# Altium PCB Flow_Pump显示板_V2.0.PcbDoc
Units mm, origin at the board's own origin, x right, y up, seen from the top; angles counter-clockwise.
Board outline 95.01 x 95.01 mm, 2 copper layers (Top Layer, Bottom Layer); 39 components, 34 nets, 112 pads, 133 vias.
Unrouted connection lines stored in the file: 141.
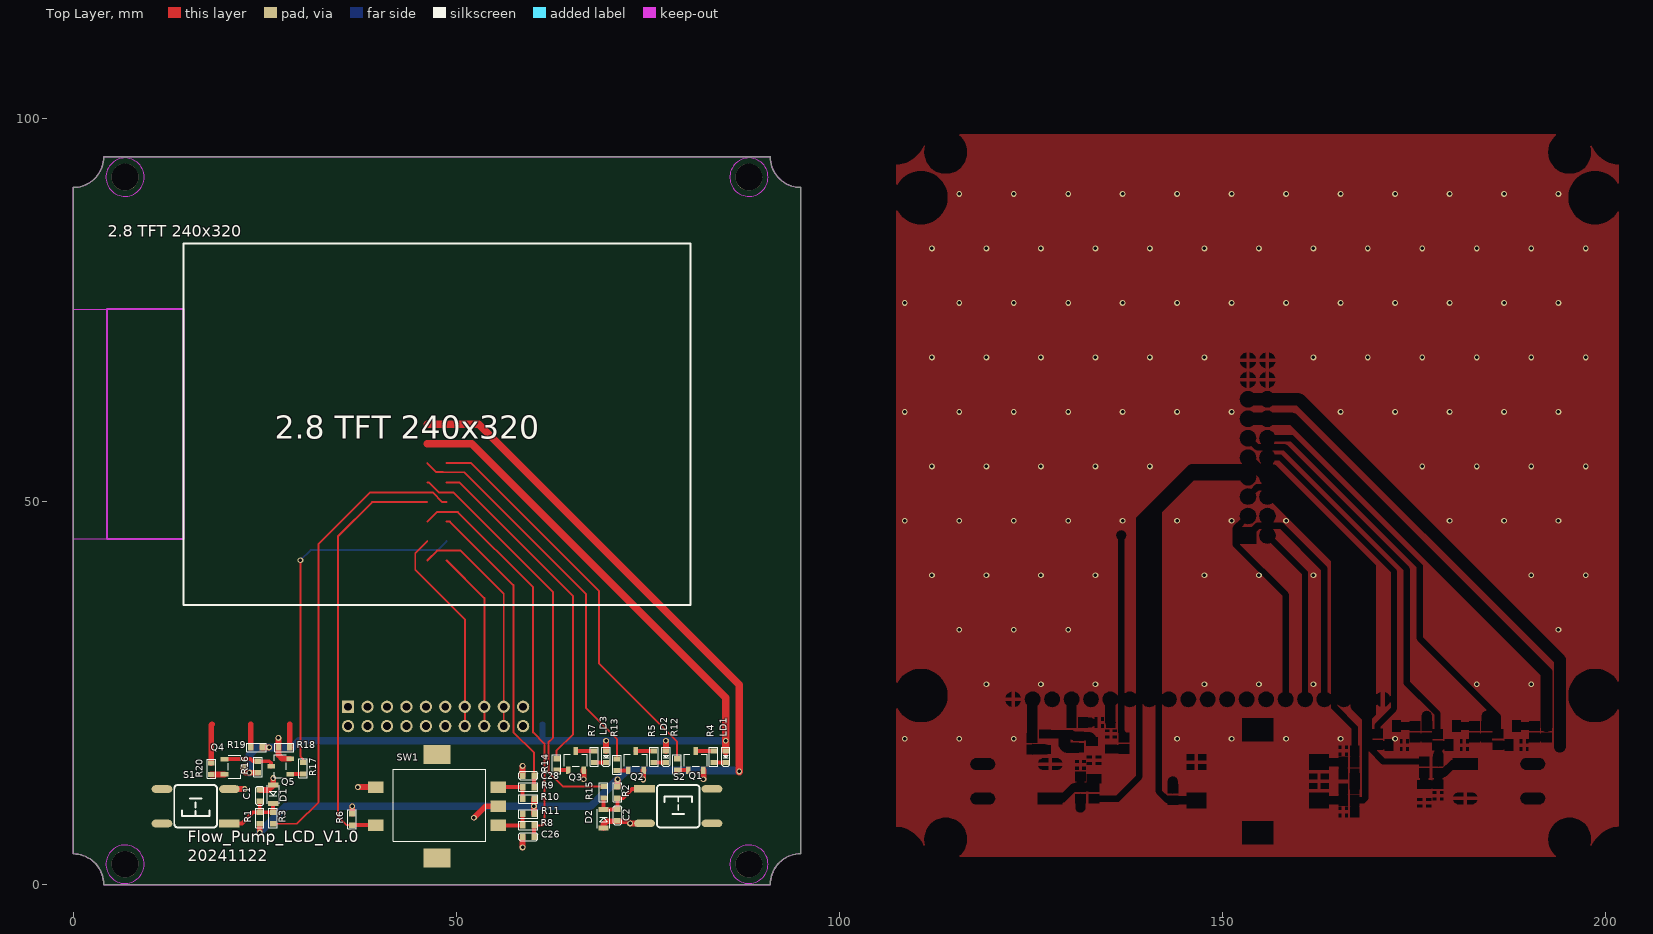
[diagram p0: Top Layer view]
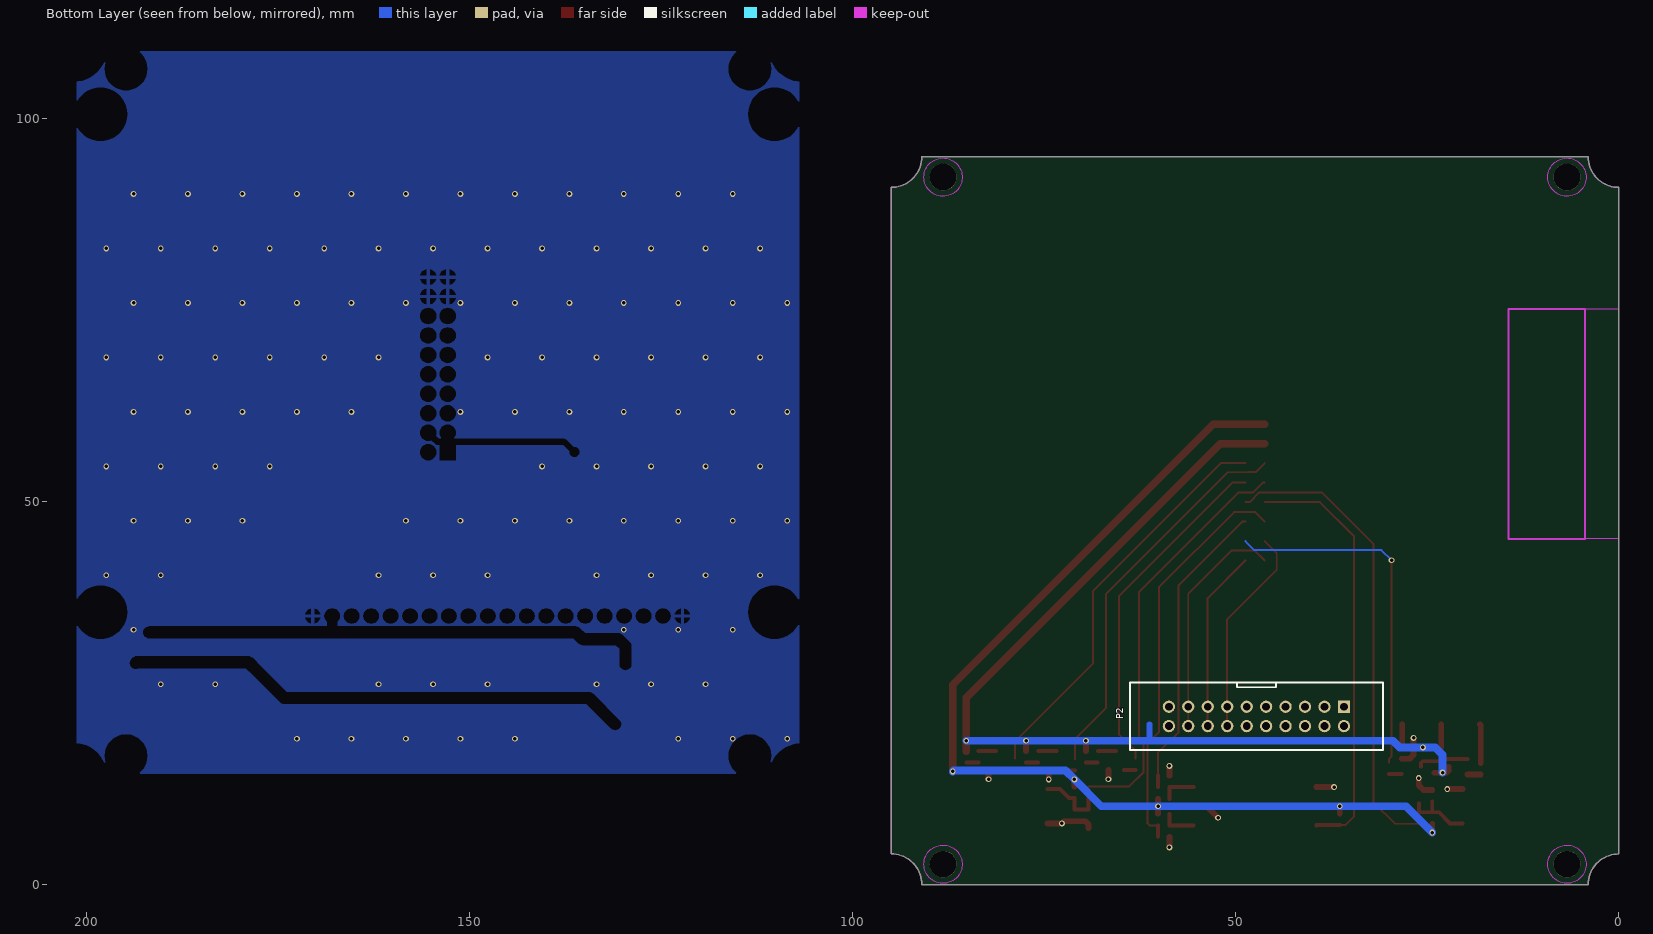
[diagram p1: Bottom Layer view, seen from below]

## Layer stack, top to bottom
Top Solder: solder mask 0.0102, Solder Resist, Dk 3.5
Top Layer: signal copper 0.0356
Dielectric 1: dielectric 0.32, FR-4, Dk 4.8
Bottom Layer: signal copper 0.0356
Bottom Solder: solder mask 0.0102, Solder Resist, Dk 3.5

## Board outline
0,3.996 0,91.012 -0.004,90.996 ccw(c-0.004,94.996) 3.996,94.996 3.988,95 91,95 90.996,95.004 ccw(c94.996,95.004) 94.996,91.004 94.996,4.004 95.004,4.004 ccw(c95.004,0.004) 91.004,0.004 91.004,0 4.004,0 4.004,-0.004 ccw(c0.004,-0.004)

## Design rules (kind name [scope] priority, off if disabled: settings)
Clearance [All] p1: gap=0.254
HoleSize [All] p1: absolutevalues=TRUE maxlimit=5.08 minlimit=0.025 maxpercent=80.000 minpercent=20.000
PolygonConnect PolygonConnect_1 [IsVia] p1: connectstyle=Direct reliefconductorwidth=0.254 reliefentries=4 polygonreliefangle="90 Angle" airgapwidth=0.254
PolygonConnect [All] p2: connectstyle=Relief reliefconductorwidth=0.508 reliefentries=4 polygonreliefangle="90 Angle" airgapwidth=0.254
RoutingVias [All] p1: holewidth=0.711 width=1.27 viastyle="Through Hole" minholewidth=0.711 minwidth=1.27 maxholewidth=0.711 maxwidth=1.27
SolderMaskExpansion [All] p1: expansion=0.102
Width [All] p1: maxlimit=3.81 minlimit=0.254 preferedwidth=0.254
29 further rules are at their usual default settings.

## Components (designator, comment, footprint, x,y, rotation, side; value= is the part's Value field where it differs from the comment)
"2.8 TFT 240x320" "LCD1" "2.8 TFT 240x320" 14.4,36.51 r0 top locked
C1 "1uF/25V" 0603C 24.368,12.354 r270 top
C2 "1uF/25V" 0603C 71.053,8.314 r90 top
C26 "10nF" 0603C 58.682,6.232 r0 top
C28 "10nF" 0603C 60.182,14.208 r180 top
D1 "CESDB5V0D3" SOD323 26.121,12.963 r270 top
D2 "CESDB5V0D3" SOD323 69.25,7.401 r90 top
LD1 "LED_Green_19-217" 0603LED 85.201,17.434 r270 top
LD2 "LED_Green_19-217" 0603LED 77.391,17.434 r270 top
LD3 "LED_Green_19-217" 0603LED 69.58,17.434 r270 top
P2 "Header 10X2" DC-2.54-L-Z-20P 47.32,21.946 r0 bottom
Q1 "MMBT3904" SOT23-3 80.28,14.934 r270 top
Q2 "MMBT3904" SOT23-3 72.476,14.934 r270 top
Q3 "MMBT3904" SOT23-3 64.643,14.934 r270 top
Q4 "SI2306" SOT23-3 19.76,16.376 r180 top
Q5 "MMBT3904" SOT23-3 28.356,14.418 r0 top
R1 "10K" 0603R 24.368,7.933 r90 top
R2 "10K" 0603R 71.053,12.786 r270 top
R3 "100" 0603R 26.121,7.933 r90 top
R4 "1K" 0603R 83.626,15.934 r90 top
R5 "1K" 0603R 75.828,15.934 r90 top
R6 "4.7K" 0603R 36.433,9.255 r270 top
R7 "1K" 0603R 68.031,15.934 r90 top
R8 "10K" 0603R 60.182,7.731 r180 top
R9 "10K" 0603R 60.182,12.709 r180 top
R10 "10K" 0603R 58.682,11.185 r0 top
R11 "10K" 0603R 58.682,9.23 r0 top
R12 "1K" 0603R 78.862,16.434 r270 top
R13 "1K" 0603R 70.977,16.392 r270 top
R14 "1K" 0603R 63.128,16.443 r270 top
R15 "100" 0603R 69.25,12.799 r270 top
R16 "10K" 0603R 24.114,16.089 r270 top
R17 "1K" 0603R 30.032,15.937 r270 top
R18 "0R" 0603R 26.805,17.891 r0 top
R19 "10K" 0603R 24.7,17.891 r180 top
R20 "0R" 0603R 18.043,14.36 r90 top
S1 "SW-PB" "TSW SMD-6*6*8" 16,10.222 r180 top locked
S2 "SW-PB" "TSW SMD-6*6*8" 79,10.222 r0 top locked
SW1 "RE1103" EX1103S-D2-10 47.5,10.222 r90 top locked

## Footprints (in the part's own frame and the unit in brackets; to place one, negate y for a bottom-side part, rotate by r counter-clockwise, add the part's x,y. Pads: shape width x height; smd on the part's side, far side on the other; paste and mask are expansions set on the pad)
"2.8 TFT 240x320" [mm] "Connector; Header; 5 Position"
  Keep-Out Layer lines w0.254: -10,8.6 0,8.6 0,38.6 -10,38.6 -10,8.6
  silkscreen extent 0,0 66.2,47.2
0603C [mm]
  rect 0.7x0.85 smd: 1(0,0) 2(1.5,0)
  silkscreen extent -0.5,-0.55 2,0.55
0603LED [mm]
  rect 0.7x0.85 smd: 1(0,0) 2(1.5,0)
  silkscreen extent -0.5,-0.55 2,0.55
0603R [mm]
  rect 0.7x0.85 smd: 1(0,0) 2(1.5,0)
  silkscreen extent -0.5,-0.55 2,0.55
DC-2.54-L-Z-20P [mm] "立式直插简牛插座，间距2.54"
  rect 1.6x1.6 hole 1.02: 1(-11.43,-1.27)
  round 1.6 hole 1.02: 2(-11.43,1.27) 3(-8.89,-1.27) 4(-8.89,1.27) 5(-6.35,-1.27) 6(-6.35,1.27) 7(-3.81,-1.27) 8(-3.81,1.27) 9(-1.27,-1.27) 10(-1.27,1.27) 11(1.27,-1.27) 12(1.27,1.27) 13(3.81,-1.27) 14(3.81,1.27) 15(6.35,-1.27) 16(6.35,1.27) 17(8.89,-1.27) 18(8.89,1.27) 19(11.43,-1.27) 20(11.43,1.27)
  silkscreen extent -16.53,-4.4 16.53,4.4, body extent -16.53,-4.4 16.52,4.7, height 8.8
EX1103S-D2-10 [mm]
  rect 1.5x2 smd: A(-2.5,-8) B(2.5,-8) C(0,-8) D(-2.5,8) E(2.5,8)
  rect 2.5x3.5 smd: A3(6.75,0) A4(-6.75,0)
  silkscreen extent -4.57,-6.35 4.83,5.71
SOD323 [mm]
  rect 0.65x1.35 smd: 1(0,0) 2(2.4,0)
  silkscreen extent -0.03,-0.8 2.44,0.8
SOT23-3 [mm]
  rect 1x0.6 smd: 1(0,0) 2(0,2) 3(-2.5,1)
  silkscreen extent -2.1,-0.5 -0.5,2.5
"TSW SMD-6*6*8" [mm] "6*6*8mm"
  rect 2.7x1 smd: 1(-4.4,2.261)
  oval 2.7x1 smd: 2(-4.4,-2.239) 3(4.4,-2.239) 4(4.4,2.261)
  silkscreen extent -2.79,-2.79 2.79,2.79, body extent -4.5,-3 4.5,3, height 7.95

## Part data
C1 C2: library part CAP
C26 C28: library part CAP, "Capacitor"
D1 D2: library part "DIODE S"
P2: "Header, 10-Pin, Dual row"
Q1 Q2 Q3 Q5: library part NPN_MMBT3904
Q4: library part BUK92150-55A, "BUK92150-55A"
R1 R2 R3 R4 R5 R7 R12 R13 R14 R15 R17 R18 R19 R20: library part RES0603
R6 R8 R9 R10 R11: library part RES2
R16: library part Res2, "Resistor"
S1 S2: "Switch"

## Free pads (board coordinates)
  round 3.5 hole 3.5 unplated: 0(6.776,2.652) 0(6.776,92.348) 0(88.224,2.652) 0(88.224,92.348)

## Via types
v1: diameter 0.762, hole 0.457, Top Layer to Bottom Layer, tented both sides, 133 vias

## Nets (pads, with @x,y where several pads share a name; then routed paths per layer and width w, separated by ;. In a path a pad name is that pad's centre, name@x,y a point inside that pad or via, vN(x,y) a via of type N, cw(c..) or ccw(c..) an arc to the next point about the centre after c; other vN are vias at no path point)
3.3V_ISO: P2.15 P2.16 R1.1 R2.1 R6.1 R10.2 R11.2 | length 137.1
  Top Layer w0.762: v1(24.368,6.791) R1.1 ; R6.1 v1(36.433,10.22) ; R11.2 R10.2 ; R2.1 71.053,13.7 v1(71.079,13.725)
  Top Layer w1.016: 46.23,60.08 52.943,60.08 86.954,26.07 v1(86.954,14.767)
  Bottom Layer w1.016: v1(24.368,6.791) 27.797,10.22 v1(36.433,10.22) v1(60.157,10.22) 67.573,10.22 v1(71.079,13.725) 72.247,14.894 86.827,14.894 v1(86.954,14.767)
FAULT: P2.12 R12.1 | length 52.9
  Top Layer w0.254: 48.77,55 51.952,55 68.666,38.287 68.666,28.838 78.862,18.642 R12.1
GND: C1.1 C2.1 C26.1 C28.2 D1.1 D2.1 P2.17 P2.18 P2.19 P2.20 Q1.2 Q2.2 Q3.2 Q5.2 R18.1 S1.2 S2.2 SW1.C SW1.E | length 27.4
  Top Layer w0.762: S1.2 v1(22.412,12.461) ; C1.1 25.511,12.354 D1.1 v1(26.121,13.903) ; v1(26.805,19.137) R18.1 26.805,16.902 27.289,16.418 Q5.2 ; v1(37.182,12.722) SW1.E ; v1(52.333,8.722) 53.834,10.222 SW1.C ; v1(58.682,4.834) C26.1 ; C28.2 v1(58.682,15.479) ; v1(66.643,13.735) Q3.2 ; D2.1 69.25,7.858 69.656,8.264 72.423,8.264 v1(72.705,7.983) S2.2 ; v1(74.431,13.725) 74.431,14.89 Q2.2@74.45,14.908 ; v1(82.28,13.751) Q1.2
  other v1: 108.569,19.034 115.681,19.034 122.793,19.034 144.129,19.034 151.241,19.034 158.353,19.034 165.465,19.034 172.577,19.034 119.237,26.146 126.349,26.146 133.461,26.146 147.685,26.146 154.797,26.146 161.909,26.146 183.245,26.146 190.357,26.146 115.681,33.258 122.793,33.258 129.905,33.258 193.913,33.258 112.125,40.37 119.237,40.37 126.349,40.37 133.461,40.37 147.685,40.37 154.797,40.37 161.909,40.37 190.357,40.37 197.469,40.37 108.569,47.482 115.681,47.482 122.793,47.482 129.905,47.482 137.017,47.482 144.129,47.482 151.241,47.482 158.353,47.482 179.689,47.482 186.801,47.482 193.913,47.482 112.125,54.594 119.237,54.594 126.349,54.594 133.461,54.594 140.573,54.594 176.133,54.594 183.245,54.594 190.357,54.594 197.469,54.594 108.569,61.706 115.681,61.706 122.793,61.706 129.905,61.706 137.017,61.706 144.129,61.706 151.241,61.706 165.465,61.706 172.577,61.706 179.689,61.706 186.801,61.706 193.913,61.706 112.125,68.818 119.237,68.818 126.349,68.818 133.461,68.818 140.573,68.818 147.685,68.818 161.909,68.818 169.021,68.818 176.133,68.818 183.245,68.818 190.357,68.818 197.469,68.818 108.569,75.93 115.681,75.93 122.793,75.93 129.905,75.93 137.017,75.93 144.129,75.93 151.241,75.93 158.353,75.93 165.465,75.93 172.577,75.93 179.689,75.93 186.801,75.93 193.913,75.93 112.125,83.042 119.237,83.042 126.349,83.042 133.461,83.042 140.573,83.042 147.685,83.042 154.797,83.042 161.909,83.042 169.021,83.042 176.133,83.042 183.245,83.042 190.357,83.042 197.469,83.042 115.681,90.154 122.793,90.154 129.905,90.154 137.017,90.154 144.129,90.154 151.241,90.154 158.353,90.154 165.465,90.154 172.577,90.154 179.689,90.154 186.801,90.154 193.913,90.154
KEYA: C26.2 P2.5 R8.1 | length 52.8
  Top Layer w0.254: 46.23,47.38 47.475,48.625 50.225,48.625 60.055,38.795 60.055,19.872 61.528,18.399 61.528,7.985 61.274,7.731 R8.1
  Top Layer w0.508: C26.2 R8.1
KEYB: C28.1 P2.6 R9.1 | length 39.6
  Top Layer w0.254: 48.77,47.38 49.184,47.38 57.49,39.075 57.49,19.898 60.182,17.205 C28.1
  Top Layer w0.508: R9.1 C28.1
KEYSW: P2.7 R6.2 SW1.D | length 55.5
  Top Layer w0.254: R6.2 35.698,7.755 34.604,8.849 34.604,45.501 39.024,49.92 46.23,49.92
  Top Layer w0.508: R6.2 39.467,7.755 SW1.D
LCD_BKL: P2.4 R17.1 | length 46.7
  Top Layer w0.254: v1(29.677,42.326) 29.677,16.723 30.032,16.367 R17.1
  Bottom Layer w0.254: v1(29.677,42.326) 30.997,43.647 47.576,43.647 48.77,44.84
LCD_CLK: P2.3 | length 27.3
  Top Layer w0.254: 46.23,44.84 44.663,43.273 44.663,41.081 51.14,34.604 51.14,20.914
LCD_CS: P2.1 | length 29.9
  Top Layer w0.254: 46.23,42.3 47.525,43.596 50.581,43.596 56.22,37.957 56.22,20.914
LCD_SID: P2.2 | length 23.4
  Top Layer w0.254: 48.77,42.3 53.68,37.391 53.68,20.914
NetC1_2: C1.2 D1.2 R1.2 R3.2 S1.1 | length 8.9
  Top Layer w0.508: S1.1 22.033,7.961 23.504,9.433 R1.2 ; C1.2 R1.2 ; D1.2 R3.2 R1.2
NetC2_2: C2.2 D2.2 R2.2 R15.2 S2.1 | length 8.8
  Top Layer w0.508: R15.2 D2.2 71.04,9.801 C2.2 R2.2 71.788,11.286 72.985,12.483 S2.1
NetLD1_2: LD1.2 R4.1 | length 1.6
  Top Layer w0.508: R4.1 LD1.2
NetLD2_2: LD2.2 R5.1 | length 1.6
  Top Layer w0.508: R5.1@75.803,15.934 LD2.2
NetLD3_2: LD3.2 R7.1 | length 1.5
  Top Layer w0.508: R7.1 LD3.2
NetP1_15: R18.2 | length 3
  Top Layer w0.762: 28.28,20.914 28.28,17.916 R18.2
NetP1_17: R19.2 | length 3
  Top Layer w0.762: R19.2 23.2,20.914
NetP1_19: R20.2 | length 5.1
  Top Layer w0.762: R20.2 18.043,20.837 18.12,20.914
NetQ1_1: Q1.1 R12.2 | length 1.4
  Top Layer w0.508: R12.2@78.851,14.945 R12.2 Q1.1
NetQ1_3: Q1.3 R4.2 | length 2.4
  Top Layer w0.508: Q1.3 Q1.3@81.315,17.434 ; Q1.3@81.289,17.459 Q1.3@81.315,17.434 ; R4.2 Q1.3@81.315,17.434
NetQ2_1: Q2.1 R13.2 | length 1.5
  Top Layer w0.508: R13.2 70.993,14.908 Q2.1@72.45,14.908
NetQ2_3: Q2.3 R5.2 | length 2.4
  Top Layer w0.508: Q2.3@73.441,17.418 73.45,17.408 Q2.3 R5.2@75.803,17.434
NetQ3_1: Q3.1 R14.2 | length 1.5
  Top Layer w0.508: R14.2@63.138,14.934 R14.2 64.634,14.943 Q3.1
NetQ3_3: Q3.3 R7.2 | length 2.4
  Top Layer w0.508: Q3.3 R7.2
NetQ4_1: Q4.1 Q5.3 R16.1 | length 6.7
  Top Layer w0.508: Q4.1 23.165,16.376 23.452,16.089 R16.1 25.611,16.089 25.856,15.844 Q5.3
NetQ5_1: Q5.1 R17.2 | length 1.7
  Top Layer w0.508: Q5.1 30.013,14.418 R17.2
NetR8_2: R8.2 R11.1 SW1.A | length 4.7
  Top Layer w0.508: SW1.A 58.673,7.722 R8.2 R11.1
NetR9_2: R9.2 R10.1 SW1.B | length 4.7
  Top Layer w0.508: SW1.B 58.669,12.722 R9.2 R10.1
RUN: P2.10 R14.1 | length 44.7
  Top Layer w0.254: 48.77,52.46 50.454,52.46 65.262,37.652 65.262,19.644 63.128,17.51 R14.1
SW1: P2.8 R3.1 | length 60.8
  Top Layer w0.254: R3.1 29.218,7.933 32.039,10.754 32.039,44.459 38.77,51.19 46.923,51.19 48.193,49.92 48.77,49.92
SW2: P2.9 R15.1 | length 54
  Top Layer w0.254: 46.23,52.46 46.491,52.46 47.761,51.19 49.641,51.19 62.62,38.211 62.62,19.11 62.062,18.551 62.062,14.665 63.927,12.799 R15.1
VCC_5V: LD1.1 LD2.1 LD3.1 P2.13 P2.14 Q4.3 R16.2 R19.1 | length 133.1
  Top Layer w0.762: Q4.3 22.26,14.843 22.514,14.589 R16.2 ; R19.1 v1(25.587,17.891) ; LD3.1 v1(69.58,18.78) ; LD2.1 v1(77.391,18.78)
  Top Layer w1.016: 46.23,57.54 52.054,57.54 85.201,24.393 v1(85.201,18.78) LD1.1
  Bottom Layer w0.762: 61.3,18.78 61.3,20.914
  Bottom Layer w1.016: v1(23.022,14.614) 23.022,16.951 23.962,17.891 v1(25.587,17.891) 28.61,17.891 29.499,18.78 61.3,18.78 v1(69.58,18.78) v1(77.391,18.78) v1(85.201,18.78)
VCC_5V_LCD: Q4.2 R20.1 | length 1.7
  Top Layer w0.762: R20.1 18.059,14.376 Q4.2
WARN: P2.11 R13.1 | length 51
  Top Layer w0.254: 46.23,55 47.398,53.832 48.268,53.832 48.281,53.819 51.076,53.819 66.938,37.957 66.938,23.073 70.977,19.034 R13.1
pads on no net: S1.3 S1.4 S2.3 S2.4 SW1.A3 SW1.A4

## Polygon pours and split planes (outlines as drawn)
GND on Top Layer "Top Layer-No Net" (solid, remove dead copper, pour order 2): 107.144,3.261 107.144,98.261 202.144,98.261 202.144,3.261
GND on Bottom Layer "Top Layer-No Net1" (solid, remove dead copper, pour order 3): 106.671,14.142 106.671,109.142 201.671,109.142 201.671,14.142

## Keep-outs
Keep-Out Layer:
  circle w0.152: c6.776,2.652 r2.5
  circle w0.152: c88.224,2.652 r2.5
  circle w0.152: c88.224,92.348 r2.5
  circle w0.152: c6.776,92.348 r2.5
  lines w0.152: 0,3.996 0,91.012 -0.004,90.996 ccw(c-0.004,94.996) 3.996,94.996 3.988,95 91,95 90.996,95.004 ccw(c94.996,95.004) 94.996,91.004 94.996,4.004 95.004,4.004 ccw(c95.004,0.004) 91.004,0.004 91.004,0 4.004,0 4.004,-0.004 ccw(c0.004,-0.004) 0.004,3.996 ; 0,45.11 4.4,45.11 ; 0,75.11 4.4,75.11

## Silkscreen, mask and mechanical layers (free items; w line width, h text height)
Top Overlay:
  text "Flow_Pump_LCD_V1.0" at 14.995,5.013 h2.54
  text "20241122" at 14.97,2.524 h2.54
Mechanical 1:
  lines w0.152: -0.004,90.996 ccw(c-0.004,94.996) 3.996,94.996 ; 0,3.996 0,91.012 ; 0,45.11 4.4,45.11 ; 0,75.11 4.4,75.11 ; 0.004,3.996 cw(c0.004,-0.004) 4.004,-0.004 ; 3.988,95 91,95 ; 4.004,0 91.004,0 ; 90.996,95.004 ccw(c94.996,95.004) 94.996,91.004 94.996,4.004 ; 91.004,0.004 cw(c95.004,0.004) 95.004,4.004